# Altium PCB UNReLo End Node PCB.PcbDoc (part 1 of 2)
Units mm, origin at the board's own origin, x right, y up, seen from the top; angles counter-clockwise.
Board outline 54 x 59 mm, 4 copper layers (Top Layer, GND, 3v3 PWR, Bottom Layer), stack 1.586 mm thick; 54 components, 49 nets, 237 pads, 64 vias.
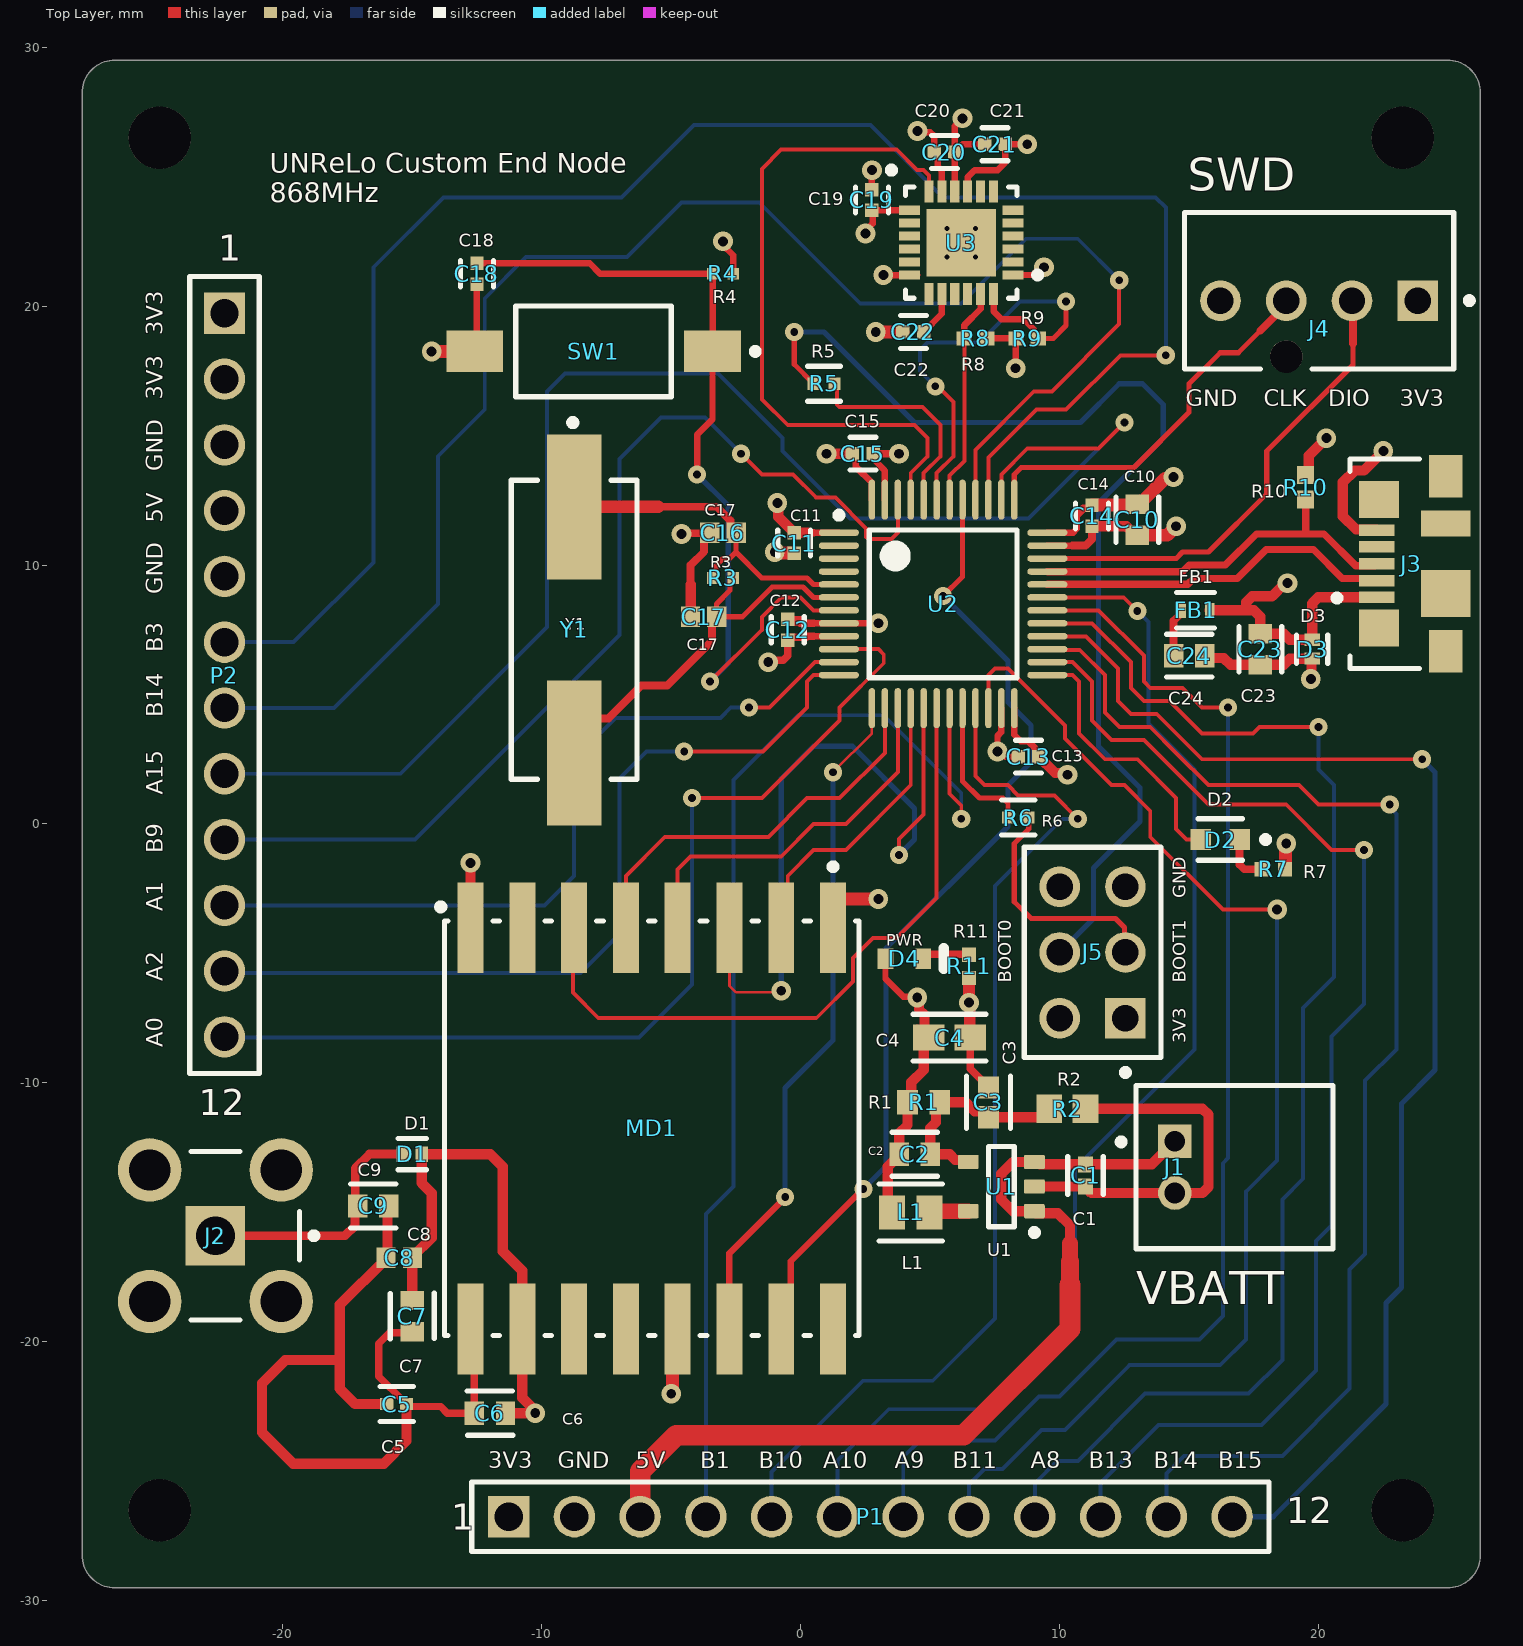
[diagram p0: Top Layer view]
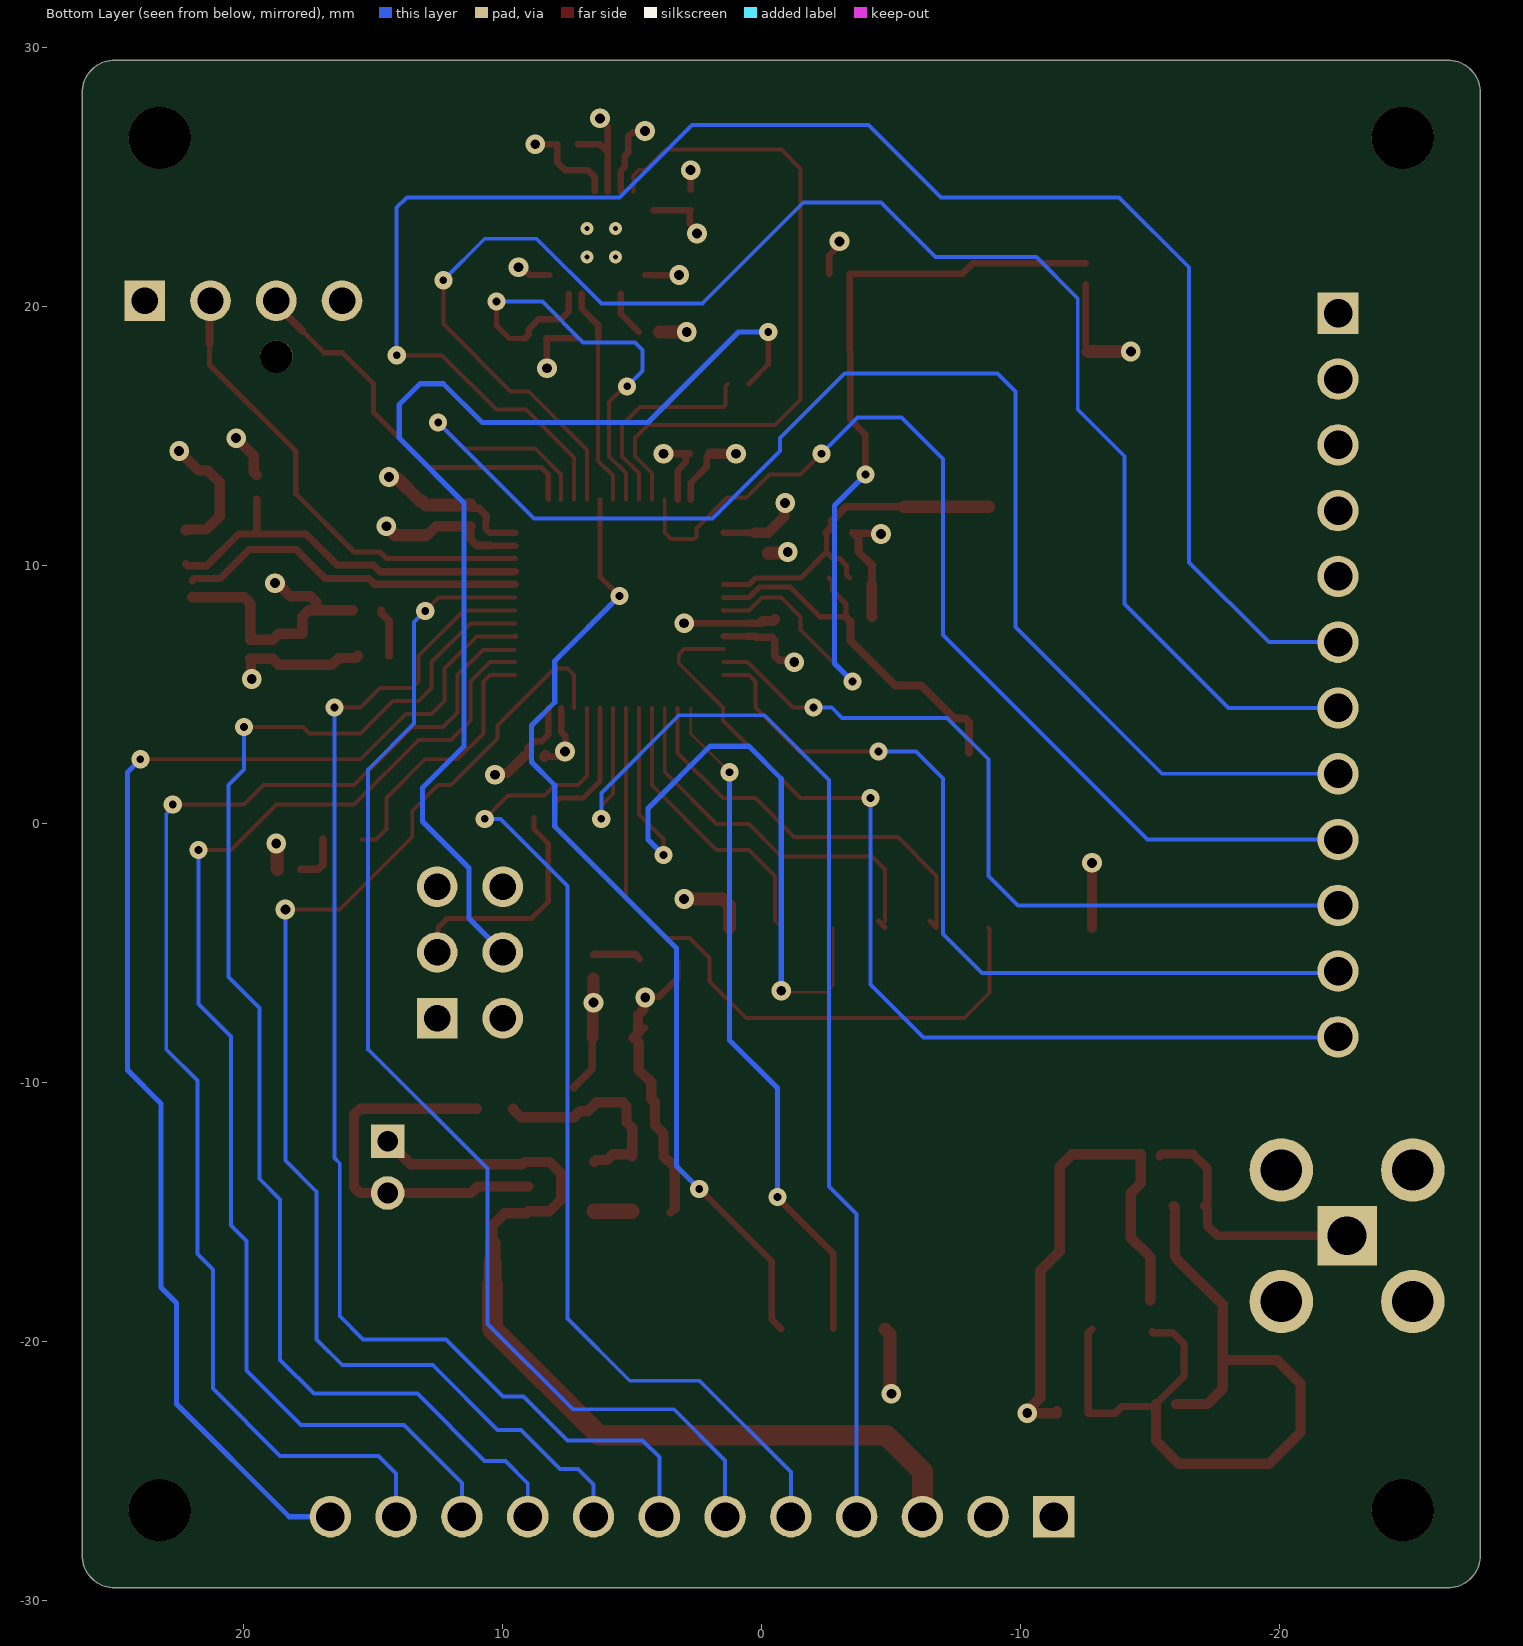
[diagram p1: Bottom Layer view, seen from below]
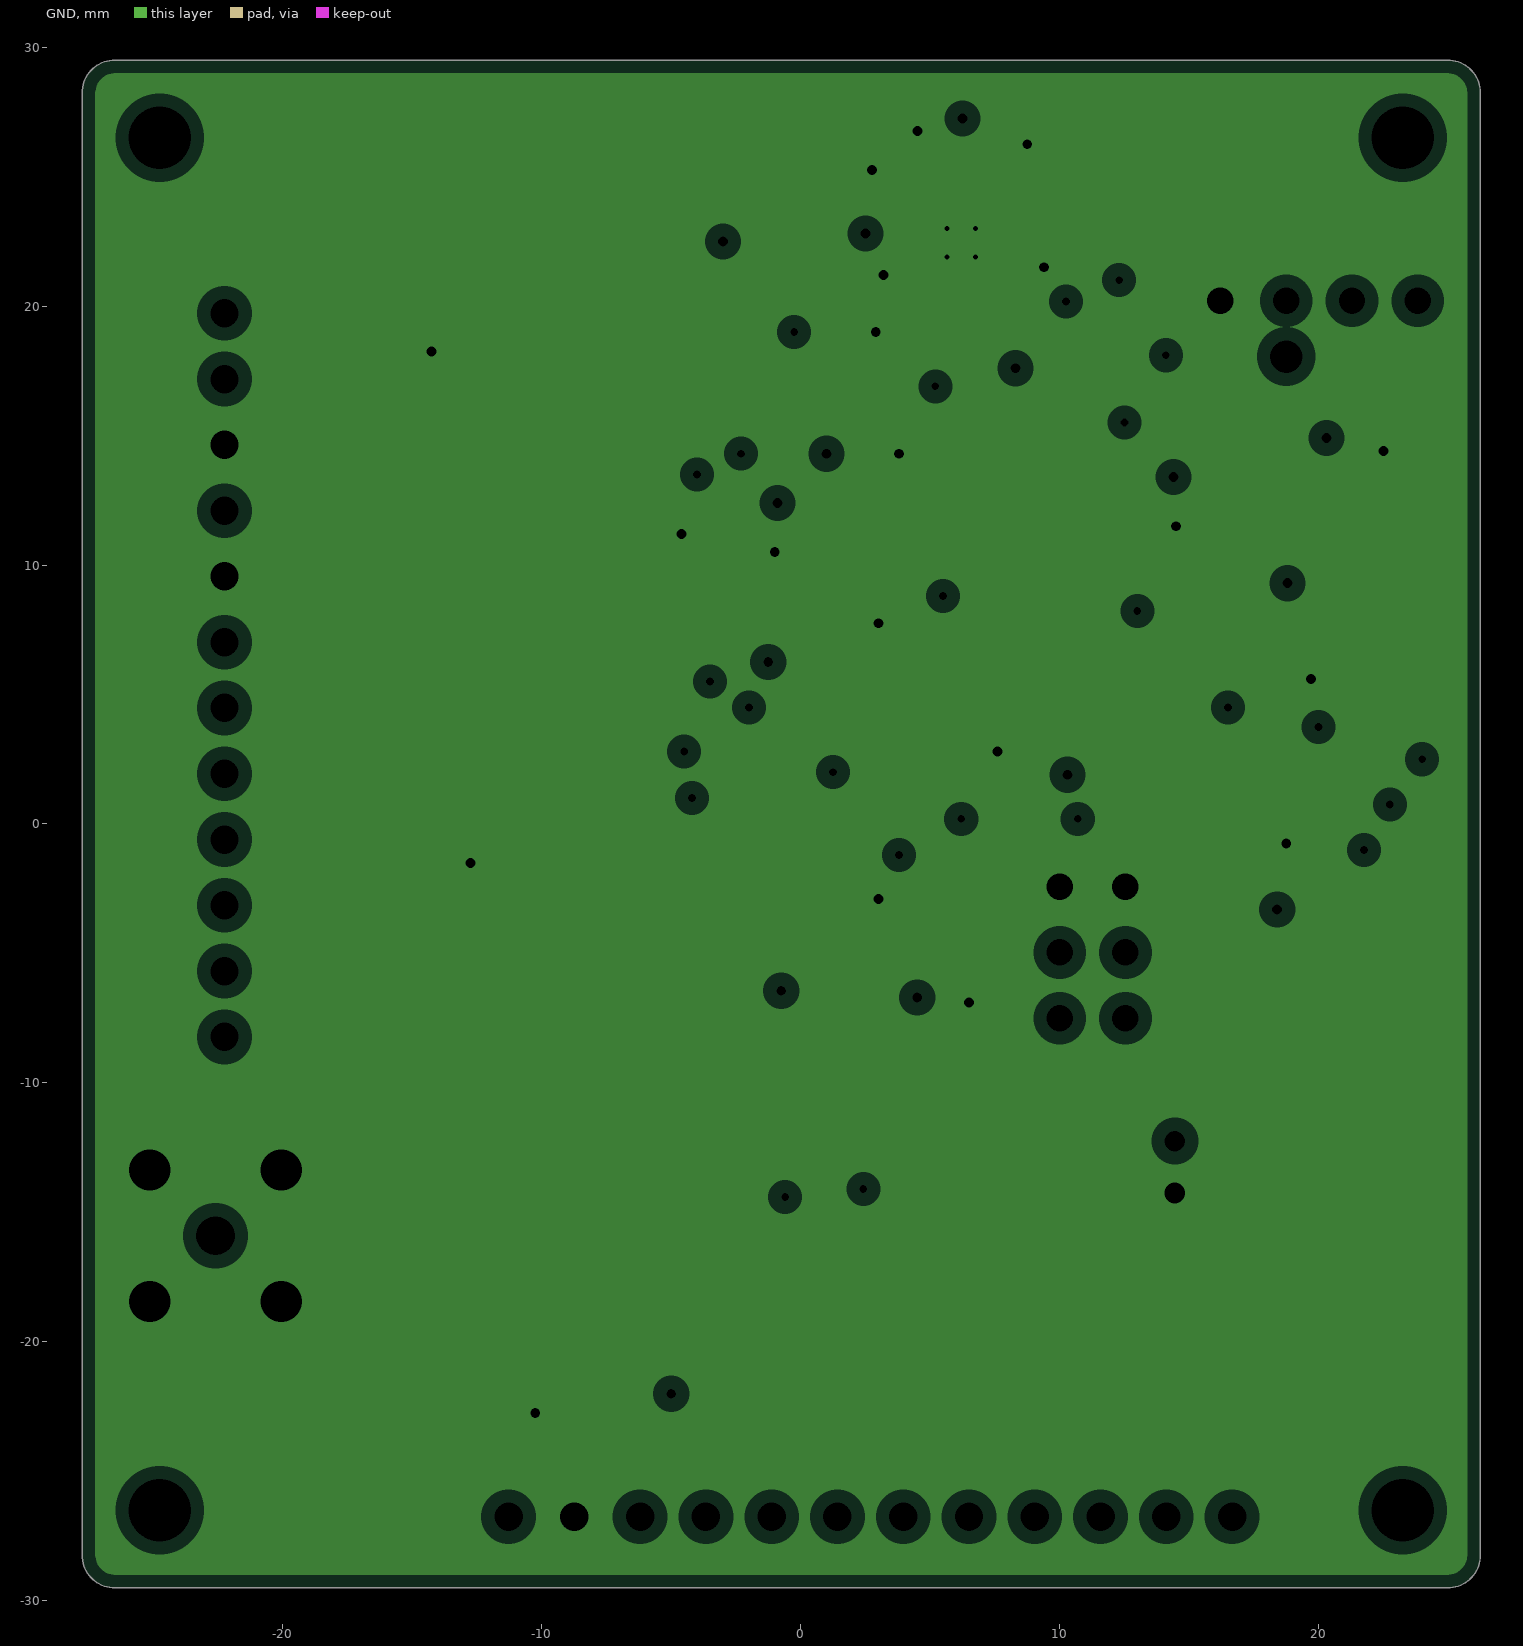
[diagram p2: GND, clearances drawn from the general rule]
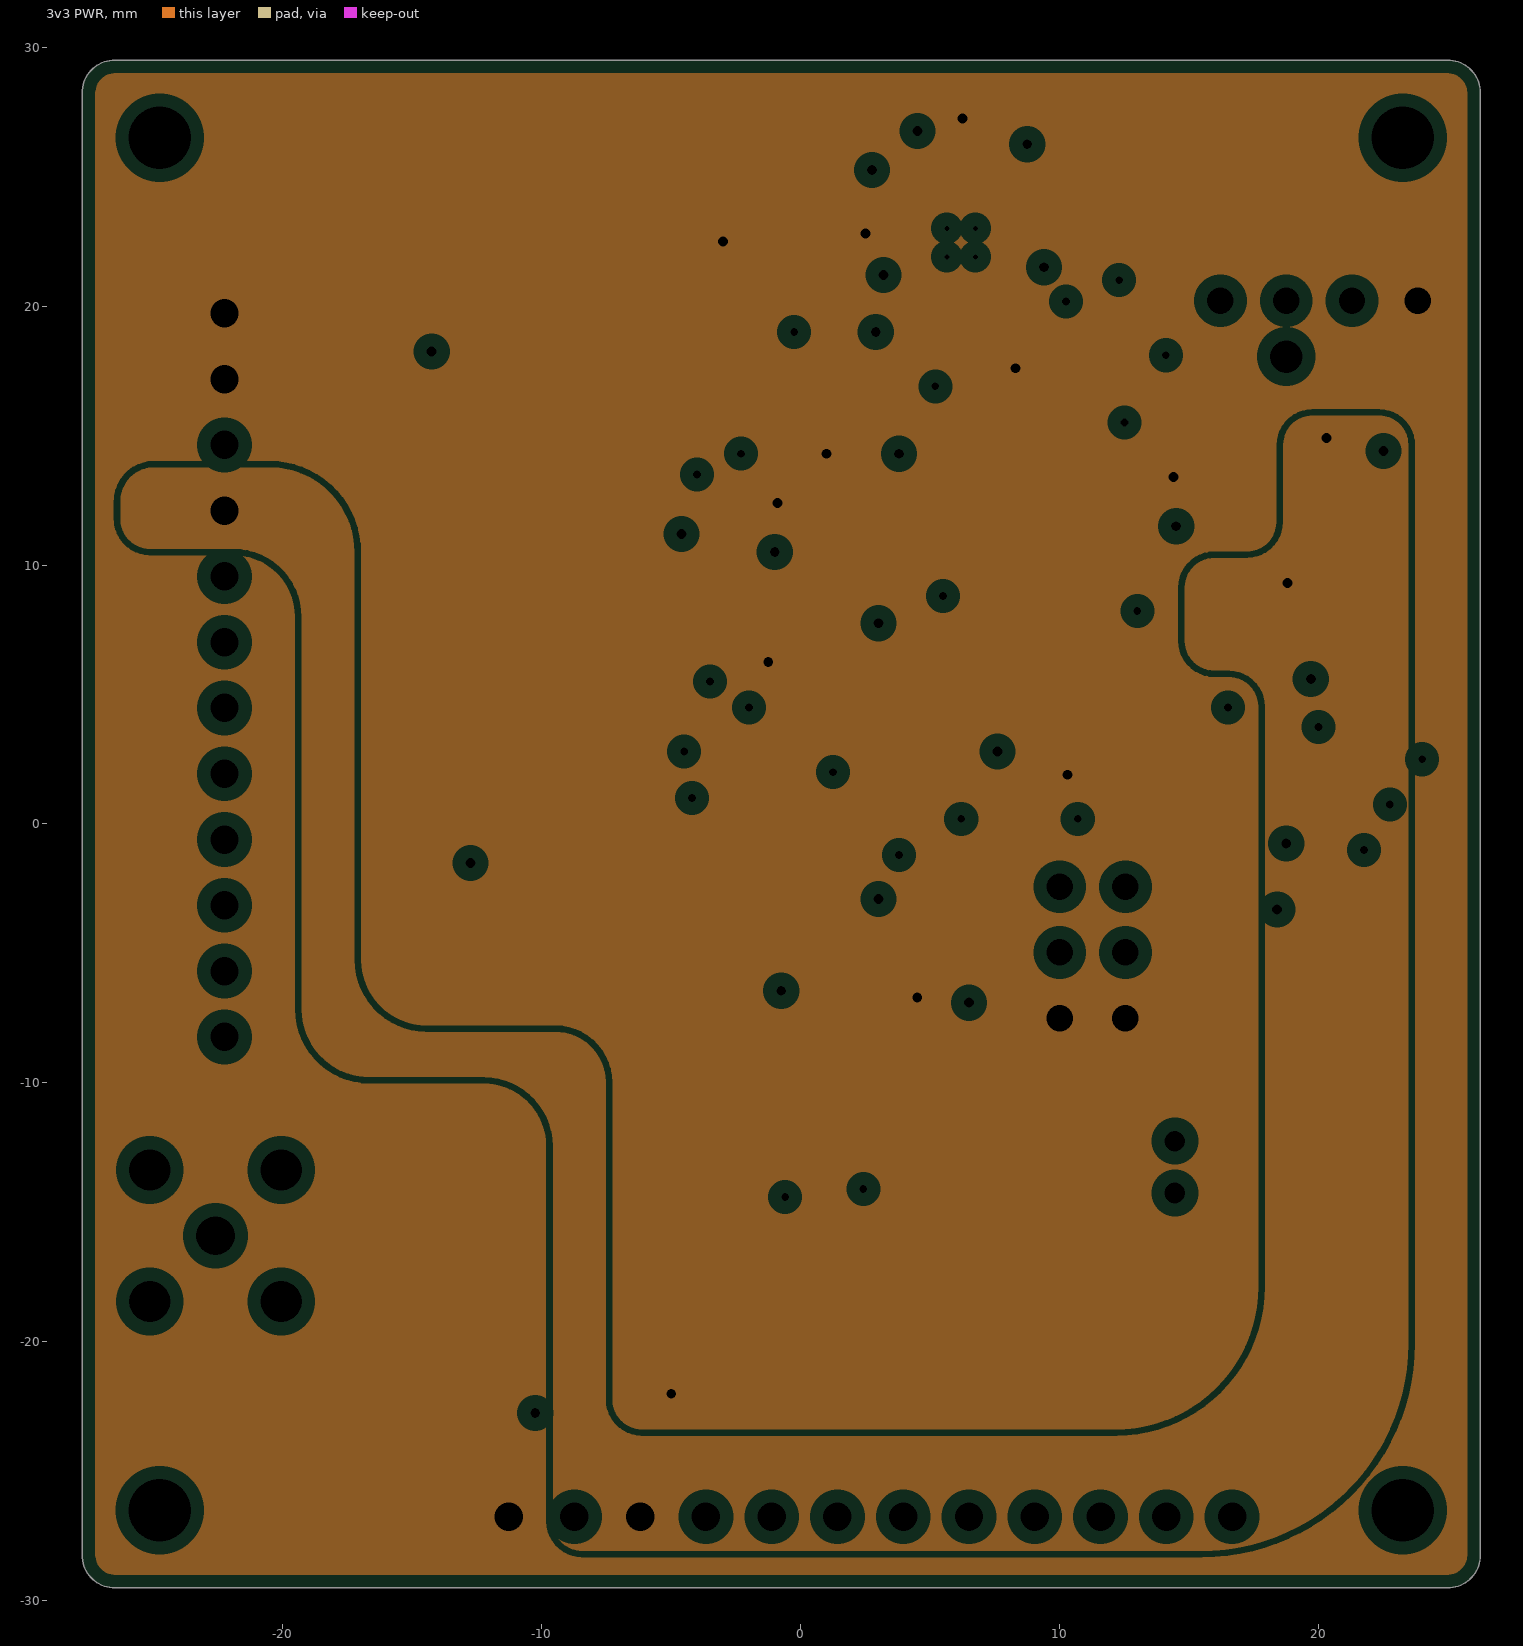
[diagram p3: 3v3 PWR, clearances drawn from the general rule]
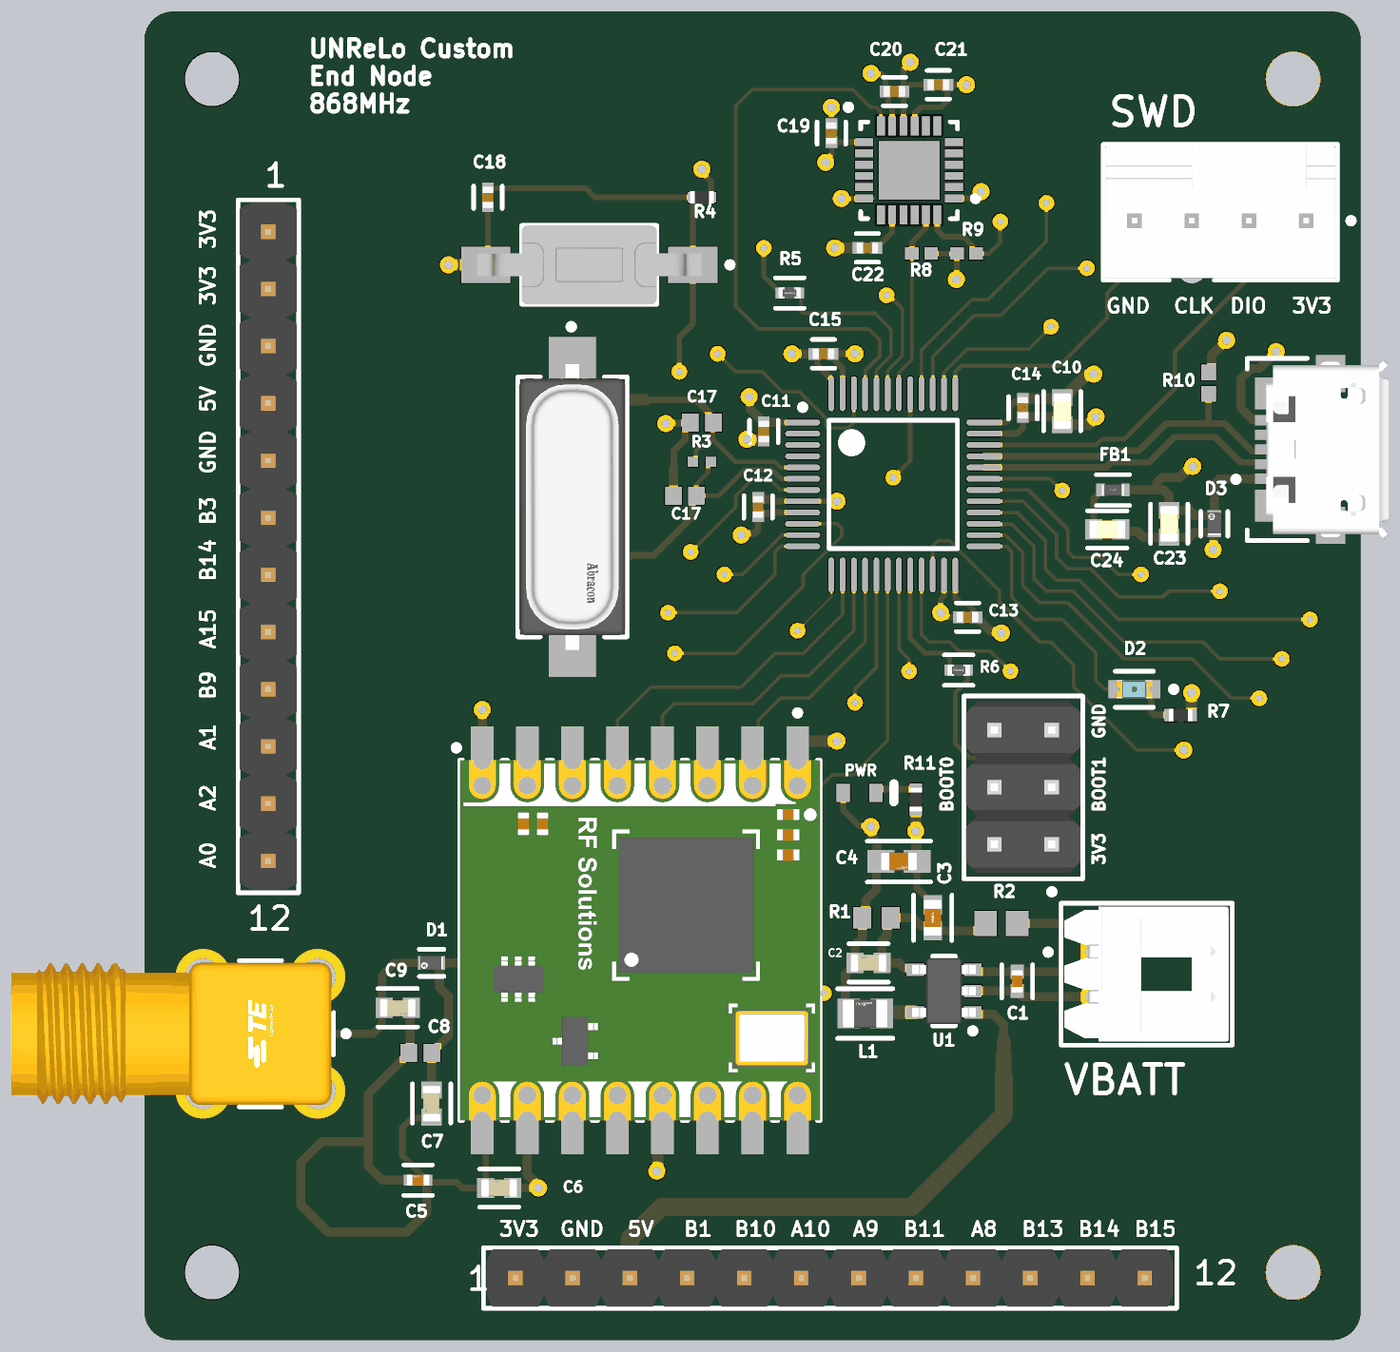
[diagram p5: 3D render of the assembled board from above, using the file's embedded part models]

## Layer stack, top to bottom
Top Solder: solder mask 0.0203, SM-001, Dk 3.8
Top Layer: signal copper 0.035
Dielectric 1: prepreg 0.2104, PP-017, Dk 4.6
GND: plane copper 0.0152, net GND
Dielectric 3: core 1.065, Core-039, Dk 4.6
3v3 PWR: plane copper 0.0152, net (Multiple Nets)
Dielectric 5: prepreg 0.2104, PP-017, Dk 4.6
Bottom Layer: signal copper 0.035
Bottom Solder: solder mask 0.0203, SM-001, Dk 3.8

## Board outline
-26.48,-29.5 cw(c-26.48,-28.23) -27.75,-28.23 -27.75,28.23 cw(c-26.48,28.23) -26.48,29.5 24.98,29.5 cw(c24.98,28.23) 26.25,28.23 26.25,-28.23 cw(c24.98,-28.23) 24.98,-29.5

## Design rules (kind name [scope] priority, off if disabled: settings)
Clearance [All] p1: gap=0.254 ignorepadtopadclearanceinfootprint=FALSE except(0.15: Arc-Arc Arc-Track Arc-Text Track-Track Track-Text SMDPad-SMDPad SMDPad-Text THPad-Text Via-Text Text-Text; 0.2: Arc-SMDPad Track-SMDPad; 0.35: Arc-THPad Track-THPad; 0.5: Arc-Hole Track-Hole SMDPad-Hole THPad-Hole Via-Hole Fill-Hole Poly-Hole Region-Hole Text-Hole)
DiffPairsRouting [All] p1: maxlimit=0.203 minlimit=0.203 mostfreqgap=0.203 toplayer_minwidth=0.284 toplayer_maxwidth=0.284 toplayer_prefwidth=0.284 bottomlayer_minwidth=0.284 bottomlayer_maxwidth=0.284 bottomlayer_prefwidth=0.284 impedanceprofiledriven=TRUE impedanceprofileid={87045DD7-67EE-41DC-9E3B-F64E1280B09F} impedanceprofilevalue=90.000000 maxuncoupledlength=12.7
HoleSize [All] p1: absolutevalues=TRUE maxlimit=6.3 minlimit=0.2 maxpercent=80.000 minpercent=20.000
HoleToHoleClearance [All] p1: gap=0.5 allowstackedmicrovias=TRUE
MinimumAnnularRing [All] p1: minimumring=0.13
MinimumSolderMaskSliver [All] p1: minsoldermaskwidth=0.2
PlaneClearance [All] p1: clearance=0.508
PlaneConnect [All] p1: planeconnectstyle=Relief reliefexpansion=0.508 reliefentries=4 reliefconductorwidth=0.254 reliefairgap=0.254
PolygonConnect [All] p1: connectstyle=Relief reliefconductorwidth=0.254 reliefentries=4 polygonreliefangle="90 Angle" airgapwidth=0.254
RoutingVias [All] p1: holewidth=0.381 width=0.762 viastyle="Through Hole" minholewidth=0.25 minwidth=0.5 maxholewidth=6.3 maxwidth=1.27
SilkToSolderMaskClearance [IsPad] p1: minsilkscreentomaskgap=0.15 clearancetoexposedcopper=TRUE
SolderMaskExpansion [All] p1: expansion=0.05 istentingtop=FALSE soldermaskfromhole=TRUE
UnRoutedNet [All] p1: checkbadconnections=TRUE
Width Width_1 [InNetClass('Non Feeds')] p1: maxlimit=0.5 minlimit=0.127 preferedwidth=0.15
Width controlled-impedance [InNet('RF')] p2: maxlimit=0.345 minlimit=0.345 preferedwidth=0.345 impedanceprofiledriven=TRUE impedanceprofileid={D0823A8F-EB08-422B-9D9E-37F3586B5351} impedanceprofilevalue=50.000000 minimp=50.000000 maximp=50.000000 favimp=50.000000
22 further rules are at their usual default settings.

## Classes and differential pairs
net class DIFF_USB: USB_D_N USB_D_P
differential pair USB_D: +USB_D_P -USB_D_N

## Components (designator, comment, footprint, x,y, rotation, side; value= is the part's Value field where it differs from the comment)
C1 "4.7u" FP-GRM155-0_1-IPC_B 11,-13.571 r270 top
C2 "6p8" FP-C0603C-CF-MFG 4.4,-12.75 r0 top value="6.8 pF"
C3 "33p" FP-CC0603-0_9-IPC_C 7.25,-10.75 r90 top
C4 "10uF" FP-GRM188-0_1-e0_2_0_55-IPC_A 5.75,-8.25 r0 top
C5 "1.5pF" FP-GJM155-0_05-IPC_C -15.6,-22.4 r180 top
C6 "3.3pF" FP-C0603C-CF-MFG -12,-22.75 r0 top value="3.3 pF"
C7 "3.3pF" FP-C0603C-CF-MFG -15,-19 r90 top value="3.3 pF"
C8 "2.7pF" CAPC1006X50X20ML10T10 -15.5,-16.75 r180 top
C9 "56pF, 1%" FP-C0603C-CF-MFG -16.5,-14.75 r180 top value="56 pF"
C10 "2u2" FP-C0603C225K4PACTU-MFG 13,11.75 r270 top
C11 "100n" FP-C0402-BB-MFG -0.25,10.85 r270 top value="0.10 μF"
C12 "100n" FP-C0402-BB-MFG -0.5,7.5 r90 top value="0.10 μF"
C13 "100n" FP-C0402-BB-MFG 8.8,2.6 r180 top value="0.10 μF"
C14 "100n" FP-C0402-BB-MFG 11.25,11.9 r270 top value="0.10 μF"
C15 "100n" FP-C0402-BB-MFG 2.4,14.3 r0 top value="0.10 μF"
C16 "22p" CAPC1006X50X20ML10T10 -3,11.25 r0 top
C17 "22p" CAPC1006X50X20ML10T10 -3.75,8 r0 top
C18 "100n" FP-C0402-BB-MFG -12.5,21.25 r270 top value="0.10 μF"
C19 "100n" FP-C0402-BB-MFG 2.75,24.1 r90 top value="0.10 μF"
C20 "100n" FP-C0402-BB-MFG 5.55,25.95 r180 top value="0.10 μF"
C21 "10n" FP-C0402-BB-MFG 7.5,26.25 r0 top value="0.01 μF"
C22 "2n2" FP-C0402-BB-MFG 4.35,19 r180 top value="2.2 nF"
C23 "2u2" FP-C0603C225K4PACTU-MFG 17.75,6.75 r270 top
C24 "2u2" FP-C0603C225K4PACTU-MFG 15,6.5 r0 top
D1 "ESD" FP-711AM-CA-MFG -15,-12.75 r180 top value=0.24pF
D2 "LED" FP-LTST-C191TBKT-MFG 16.2,-0.6 r180 top
D3 "ESD" FP-711AM-CA-MFG 19.75,6.75 r90 top value=0.24pF
D4 "PWR_LED" VISH-TLMS1000_V 4,-5.2 r0 top
FB1 "120R" FP-MMZ1005-IPC_B 15.25,8.25 r180 top
J1 "BATT IN" FP-53254-0270-MFG 16.75,-13.25 r270 top
J2 "5-1814400-2" FP-5-1814400-2-MFG -26.55,-15.9 r180 top
J3 "MICRO_USB" FP-473460001-MFG 24.56,10.05 r90 top
J4 "SWD" FP-47053-1000-MFG 20.02,20.59 r0 top
J5 "BOOT" FP-M20-9980346-MFG 11.27,-4.96 r90 top
L1 "2u2" FP-LQM21PH_G0-IPC_C 4.25,-15 r180 top
MD1 "RFM95W-868S2" FP-RFM95W-868S2-MFG -5.75,-11.75 r270 top
P1 "HEADER" 61301211121 2.69,-26.75 r0 top
P2 "HEADER" 61301211121 -22.25,5.75 r270 top
R1 "562k" RESC1609X50X30NL10T20 4.75,-10.75 r180 top
R2 "100k" RESC1608X55X30ML20T20 10.3,-11 r180 top
R3 "10M" RESC1005X40X25LL05T05 -3,9.5 r0 top
R4 "10k" RESC1005X40X25LL05T05 -3,21.25 r180 top
R5 "100k" FP-ERJ2RK-IPC_C 0.902,17 r180 top
R6 "100k" FP-ERJ2RK-IPC_C 8.402,0.25 r0 top
R7 "1k" RESC1005X40X25NL05T05 18.25,-1.75 r180 top
R8 "2k2" RESC1005X40X25NL05T10 6.75,18.75 r0 top
R9 "2k2" RESC1005X40X25NL05T10 8.75,18.75 r180 top
R10 "1.5k" RESC1005X40X25ML05T10 19.5,13 r90 top
R11 "1k" RESC1005X40X25NL05T05 6.5,-5.5 r90 top
SW1 "SW-PB" TECO-FSMSM-2_V -8,18.25 r180 top
U1 "VREG" DBV0005A_L 7.75,-14 r180 top
U2 "STM32F103CBT6" STM-LQFP48_L 5.5,8.5 r0 top
U3 "MPU-6050" IS-QFN-24_V 6.2,22.45 r180 top
Y1 "8MHz" FP-ABLS-MFG -8.75,7.5 r270 top

## Footprints (in the part's own frame and the unit in brackets; to place one, negate y for a bottom-side part, rotate by r counter-clockwise, add the part's x,y. Pads: shape width x height; smd on the part's side, far side on the other; paste and mask are expansions set on the pad)
61301211121 [mm] "Pin Header, pitch 2.54 mm, THT, Vertical, single row, 12p"
  rect 1.6x1.6 hole 1.1: 1(-13.97,0)
  round 1.6 hole 1.1: 2(-11.43,0) 3(-8.89,0) 4(-6.35,0) 5(-3.81,0) 6(-1.27,0) 7(1.27,0) 8(3.81,0) 9(6.35,0) 10(8.89,0) 11(11.43,0) 12(13.97,0)
  silkscreen extent -15.39,-1.35 15.39,1.35, body extent -15.24,-1.27 15.24,1.27, height 8.57
CAPC1006X50X20ML10T10 [mm] "Chip Capacitor, 2-Leads, Body 1.00x0.55mm, IPC Low Density"
  rect 0.74x0.8 smd: 1(-0.51,0) 2(0.51,0)
  body extent -0.55,-0.33 0.55,0.32, height 0.5
DBV0005A_L [mm] "SOT23, 5-Leads, Body 3.05x1.75mm, Pitch 0.95mm, IPC High Density"
  rrect18% 0.8x0.55 smd: 1(-1.275,0.95) 2(-1.275,0) 3(-1.275,-0.95) 4(1.275,-0.95) 5(1.275,0.95)
  silkscreen extent -1.4,-1.55 0.5,1.9, body extent -1.42,-1.46 1.42,1.46, height 1.08
FP-5-1814400-2-MFG [mm]
  rect 2.3x2.3 hole 1.5 paste-1000 mask+0: 1(-3.95,0)
  round 2.45 hole 1.6 paste-1000 mask+0: 2(-6.49,2.54) 3(-1.41,2.54) 4(-6.49,-2.54) 5(-1.41,-2.54)
  silkscreen extent -7.88,-3.25 -3.01,3.25, body extent -7.81,-3.87 7.3,3.87, height 0.25
FP-711AM-CA-MFG [mm]
  rect 0.47x0.6 smd paste+0 mask+0: 1(-0.365,0) 2(0.365,0)
  silkscreen extent -0.55,-0.6 0.55,0.6, body extent -0.7,-0.43 0.7,0.43, height 0.25
FP-47053-1000-MFG [mm]
  rect 1.57x1.57 hole 1.02 paste-1000 mask+0: 1(3.81,-0.38)
  round 1.57 hole 1.02 paste-1000 mask+0: 2(1.27,-0.38) 3(-1.27,-0.38) 4(-3.81,-0.38)
  round 1.25 hole 1.25 unplated paste-1000 mask+0: ""(-1.27,-2.54)
  silkscreen extent -5.2,-3.02 5.93,3.02, body extent -5.3,-3.26 5.3,3.12, height 0.25
FP-53254-0270-MFG [mm]
  rect 1.3x1.3 hole 0.8 paste-1000 mask+0: 1(-1,-2.3)
  round 1.3 hole 0.8 paste-1000 mask+0: 2(1,-2.3)
  silkscreen extent -3.15,-4.5 3.15,3.8, body extent -3.25,-3.9 3.25,3.9, height 0.25
FP-473460001-MFG [mm]
  rect 0.45x1.38 smd paste+0 mask+0: 1(-1.3,2.31) 2(-0.65,2.31) 3(0,2.31) 4(0.65,2.31) 5(1.3,2.31)
  rect 1.425x1.55 smd paste+0 mask+0: 6(-2.488,2.225) 7(2.488,2.225)
  rect 1.65x1.3 smd paste+0 mask+0: 8(-3.375,-0.35) 11(3.375,-0.35)
  rect 1.8x1.9 smd paste+0 mask+0: 9(-1.15,-0.35)
  rect 1x1.9 smd paste+0 mask+0: 10(1.55,-0.35)
  silkscreen extent -4.05,0.67 4.05,3.97, body extent -4.3,-2.48 4.3,3.45, height 0.25
FP-ABLS-MFG [mm]
  rect 5.6x2.1 smd paste+0 mask+0: 1(-4.75,0) 2(4.75,0)
  silkscreen extent -5.77,-2.42 5.77,2.42, body extent -7.65,-2.52 7.65,2.52, height 0.25
FP-C0402-BB-MFG [mm]
  rect 0.52x0.52 smd paste+0 mask+0: 1(-0.4,0) 2(0.4,0)
  silkscreen extent -0.5,-0.64 0.5,0.64, body extent -0.8,-0.4 0.8,0.4, height 0.25
FP-C0603C225K4PACTU-MFG [mm]
  rect 0.75x0.9 smd paste+0 mask+0: 1(-0.6,0) 2(0.6,0)
  silkscreen extent -0.87,-0.82 0.87,0.82, body extent -1.2,-0.6 1.2,0.6, height 0.25
FP-C0603C-CF-MFG [mm]
  rect 0.75x0.9 smd paste+0 mask+0: 1(-0.6,0) 2(0.6,0)
  silkscreen extent -0.87,-0.85 0.88,0.85, body extent -1.2,-0.6 1.2,0.6, height 0.25
FP-CC0603-0_9-IPC_C [mm]
  rect 0.858x0.812 smd paste+0 mask+0: 1(-0.577,0) 2(0.577,0)
  silkscreen extent -1.01,-0.85 1.01,0.85, body extent -1.11,-0.55 1.11,0.55, height 0.25
FP-ERJ2RK-IPC_C [mm]
  rect 0.468x0.472 smd paste+0 mask+0: 1(-0.402,0) 2(0.402,0)
  silkscreen extent -0.64,-0.67 0.64,0.67, body extent -0.74,-0.38 0.74,0.38, height 0.25
FP-GJM155-0_05-IPC_C [mm]
  rect 0.515x0.472 smd paste+0 mask+0: 1(-0.379,0) 2(0.379,0)
  silkscreen extent -0.64,-0.67 0.64,0.67, body extent -0.74,-0.38 0.74,0.38, height 0.25
FP-GRM155-0_1-IPC_B [mm]
  rect 0.615x0.572 smd paste+0 mask+0: 1(-0.429,0) 2(0.429,0)
  silkscreen extent -0.74,-0.69 0.74,0.69, body extent -0.89,-0.44 0.89,0.44, height 0.25
FP-GRM188-0_1-e0_2_0_55-IPC_A [mm]
  rect 1.208x1.012 smd paste+0 mask+0: 1(-0.802,0) 2(0.802,0)
  silkscreen extent -1.41,-0.91 1.41,0.91, body extent -1.91,-1.01 1.91,1.01, height 0.25
FP-LQM21PH_G0-IPC_C [mm]
  rect 1.006x1.308 smd paste+0 mask+0: 1(-0.726,0) 2(0.726,0)
  silkscreen extent -1.23,-1.1 1.23,1.1, body extent -1.33,-0.8 1.33,0.8, height 0.25
FP-LTST-C191TBKT-MFG [mm]
  rect 0.8x0.8 smd paste+0 mask+0: 1(-0.75,0) 2(0.75,0)
  silkscreen extent -1.88,-0.8 0.85,0.8, body extent -1.25,-0.55 1.25,0.55, height 0.25
FP-M20-9980346-MFG [mm]
  rect 1.57x1.57 hole 1.02 paste-1000 mask+0: 1(-2.54,-1.27)
  round 1.57 hole 1.02 paste-1000 mask+0: 2(-2.54,1.27) 3(0,-1.27) 4(0,1.27) 5(2.54,-1.27) 6(2.54,1.27)
  silkscreen extent -4.76,-2.64 4.06,2.64, body extent -4.16,-2.74 4.16,2.74, height 0.25
FP-MMZ1005-IPC_B [mm]
  rect 0.372x0.572 smd paste+0 mask+0: 1(-0.55,0) 2(0.55,0)
  silkscreen extent -0.74,-0.69 0.74,0.69, body extent -0.89,-0.44 0.89,0.44, height 0.25
FP-RFM95W-868S2-MFG [mm]
  rect 3.5x1 smd paste+0 mask+0: 1(-7.75,7) 2(-7.75,5) 3(-7.75,3) 4(-7.75,1) 5(-7.75,-1) 6(-7.75,-3) 7(-7.75,-5) 8(-7.75,-7) 9(7.75,-7) 10(7.75,-5) 11(7.75,-3) 12(7.75,-1) 13(7.75,1) 14(7.75,3) 15(7.75,5) 16(7.75,7)
  silkscreen extent -10.22,-8 8,8, body extent -9.6,-8.1 9.6,8.1, height 0.25
IS-QFN-24_V [mm] "QFN, 24-Leads, Body 4x4mm, Pitch 0.5mm, Thermal Pad 2.7x2.6mm"
  rect 0.8x0.35 smd: 1(-2,1.25) 2(-2,0.75) 3(-2,0.25) 4(-2,-0.25) 5(-2,-0.75) 6(-2,-1.25) 13(2,-1.25) 14(2,-0.75) 15(2,-0.25) 16(2,0.25) 17(2,0.75) 18(2,1.25)
  rect 0.35x0.85 smd mask+0.102: 7(-1.25,-1.975) 8(-0.75,-1.975) 9(-0.25,-1.975) 10(0.25,-1.975) 11(0.75,-1.975) 12(1.25,-1.975) 19(1.25,1.975) 20(0.75,1.975) 21(0.25,1.975) 22(-0.25,1.975) 23(-0.75,1.975) 24(-1.25,1.975)
  rect 2.7x2.6 smd: 25(0,0)
  silkscreen extent -3.08,-2.15 2.15,2.15, body extent -2,-2 2,2, height 0.95
RESC1005X40X25LL05T05 [mm] "Chip Resistor, 2-Leads, Body 1.00x0.50mm, IPC High Density"
  rect 0.45x0.45 smd: 1(-0.4,0) 2(0.4,0)
  body extent -0.53,-0.27 0.53,0.28, height 0.4
RESC1005X40X25ML05T10 [mm] "Chip Resistor, 2-Leads, Body 1.00x0.50mm, IPC Low Density"
  rect 0.7x0.65 smd: 1(-0.475,0) 2(0.475,0)
  body extent -0.53,-0.27 0.53,0.28, height 0.4
RESC1005X40X25NL05T05 [mm] "Chip Resistor, 2-Leads, Body 1.05x0.55mm, IPC Medium Density"
  rect 0.55x0.55 smd: 1(-0.45,0) 2(0.45,0)
  body extent -0.53,-0.28 0.53,0.28, height 0.4
RESC1005X40X25NL05T10 [mm] "Chip Resistor, 2-Leads, Body 1.00x0.50mm, IPC Medium Density"
  rect 0.6x0.55 smd: 1(-0.425,0) 2(0.425,0)
  body extent -0.53,-0.27 0.53,0.28, height 0.4
RESC1608X55X30ML20T20 [mm] "Chip Resistor, 2-Leads, Body 1.60x0.80mm, IPC Low Density"
  rect 1x1.1 smd: 1(-0.7,0) 2(0.7,0)
  body extent -0.9,-0.5 0.9,0.5, height 0.55
RESC1609X50X30NL10T20 [mm] "Chip Resistor, 2-Leads, Body 1.55x0.85mm, IPC Medium Density"
  rect 0.8x0.95 smd: 1(-0.625,0) 2(0.625,0)
  body extent -0.82,-0.48 0.82,0.48, height 0.5
STM-LQFP48_L [mm] "QFP, 48-Leads, Body 7x7mm, Pitch 0.5mm, IPC High Density"
  oval 1.55x0.25 smd: 1(-4.025,2.75) 2(-4.025,2.25) 3(-4.025,1.75) 4(-4.025,1.25) 5(-4.025,0.75) 6(-4.025,0.25) 7(-4.025,-0.25) 8(-4.025,-0.75) 9(-4.025,-1.25) 10(-4.025,-1.75) 11(-4.025,-2.25) 12(-4.025,-2.75) 25(4.025,-2.75) 26(4.025,-2.25) 27(4.025,-1.75) 28(4.025,-1.25) 29(4.025,-0.75) 30(4.025,-0.25) 31(4.025,0.25) 32(4.025,0.75) 33(4.025,1.25) 34(4.025,1.75) 35(4.025,2.25) 36(4.025,2.75)
  oval 0.25x1.55 smd: 13(-2.75,-4.025) 14(-2.25,-4.025) 15(-1.75,-4.025) 16(-1.25,-4.025) 17(-0.75,-4.025) 18(-0.25,-4.025) 19(0.25,-4.025) 20(0.75,-4.025) 21(1.25,-4.025) 22(1.75,-4.025) 23(2.25,-4.025) 24(2.75,-4.025) 37(2.75,4.025) 38(2.25,4.025) 39(1.75,4.025) 40(1.25,4.025) 41(0.75,4.025) 42(0.25,4.025) 43(-0.25,4.025) 44(-0.75,4.025) 45(-1.25,4.025) 46(-1.75,4.025) 47(-2.25,4.025) 48(-2.75,4.025)
  silkscreen extent -4.15,-2.85 2.85,3.55, body extent -3.5,-3.5 3.5,3.5, height 1.6
TECO-FSMSM-2_V [mm] "SMD, 2-Leads, Body 6x3.5mm, Pitch 9.19mm"
  rect 2.2x1.6 smd: 1(-4.595,0)
  rect 2.18x1.6 smd: 2(4.595,0)
  silkscreen extent -6.37,-1.75 3,1.75, body extent -4.98,-1.75 4.98,1.75, height 4.4
VISH-TLMS1000_V [mm] "SMD, 2-Leads, Body 0.8x1.6mm"
  rect 0.6x0.8 smd: 1(-0.725,0) 2(0.725,0)
  silkscreen extent 1.52,-0.4 1.52,0.4, body extent -0.8,-0.4 0.8,0.4, height 0.65

## Part data
C1: library part CMP-2008-04549-2, "Chip Multilayer Ceramic Capacitors for General Purpose, 0402, 4.7uF, X5R, 15%, 20%, 6.3V", Capacitance=4.7uF, Case Code (Imperial)=0402, Case Code (Metric)=1005, Dielectric=X5R, Manufacturer 1="Samsung Electro-Mechanics", Manufacturer Part Number 1=CL05A475MO5NUNC, Max Operating Temperature=85°C, Min Operating Temperature=-55°C, Package Quantity=10000, Supplier Part Number 1=1276-6836-1-ND, Tolerance=20%, Voltage=6.3V, Voltage Rating=16V, Case/Package=0402, Contact Plating=Tin, Depth=0.5mm, Height=0.5mm, Lead Free="Lead Free", Length=1mm, Mount="Surface Mount", Name=CL05A475MO5NUNC, Packaging="Tape and Reel", REACH SVHC="No SVHC", Supplier 1=Digi-Key, Supplier Unit Price 1=$0.44, Termination=SMD/SMT, Thickness=0.022inch, Voltage Rating (DC)=16V, Weight=0.000212oz, Width=0.02inch
C2: library part CMP-2006-03271-2, "CAP CER 6.8PF 50V NP0 0603", Capacitance="6.8 pF", Manufacturer=KEMET, Manufacturer 1="TDK Corporation", Manufacturer Part Number=C0603C689C5GACTU, Manufacturer Part Number 1=C1608CH2A6R8D080AA, Package=C0603C-CF, Supplier Part Number 1=445-11157-1-ND, Temperature="-55°C to +125°C", Temperature Characteristic=C0G, Temperature Coefficient=30ppm/°C, Temperature Range High=+125°C, Temperature Range Low=-55°C, Tolerance="0.25 pF", Voltage Rating="100 V", Automotive=Yes, Automotive Grade="Grade 1", Category=Cap, ComponentLink2Description=Datasheet, ComponentLink2URL=https://api.kemet.com/component-edge/download/datasheet/C0603C100J5GACAUTO.pdf, Device Class L1="Passive Components", Device Class L2=Capacitors, Device Class L3="Ceramic Capacitors", Digikey Description="CAP CER 6.8PF 50V NP0 0603", Height=0.87mm, Lead Free=Yes, Material=Ceramic, Mouser Description="0603 C 6.8pF Ceramic Multilayer Capacitor; 50V dc; +125C; C0G Dielectric; +/-0.25pF", Name=C1608CH2A6R8D080AA, Octopart=https://octopart.com/c0603c689c5gactu-kemet-8718591, RoHS=TRUE, Supplier 1=Digi-Key, Supplier Unit Price 1=$0.14
C3: library part CMP-2000-06072-2, "CAP CER 33PF 50V C0G/NPO 0603", Capacitance=33pF, Case Code (Imperial)=0603, Case Code (Metric)=1608, Dielectric=C0G, Dielectric Material=Ceramic, Insulation Resistance=100GR, Manufacturer 1=KEMET, Manufacturer Part Number 1=C0603H330J5GAC7867, Max Operating Temperature=125°C, Min Operating Temperature=-55°C, Package Quantity=1, Supplier Part Number 1=399-17603-1-ND, Temperature Coefficient=30ppm/°C, Tolerance=5%, Voltage=50V, Case/Package=0603, Depth=0.8mm, Height=0.8mm, Lead Free="Lead Free", Length=1.6mm, Mount="Surface Mount", Name=C0603H330J5GAC7867, Number of Pins=2, Packaging="Tape and Reel", Radiation Hardening=No, REACH SVHC="No SVHC", Resistor Type=Ceramic, RoHS Compliant=Yes, Series=CC, Supplier 1=Digi-Key, Supplier Unit Price 1=0.76, Termination=SMD/SMT, Thickness=0.035inch, Voltage Rating=50V, Voltage Rating (DC)=50V, Width=0.031inch
C4: library part CMP-2006-02792-2, "10 µF ±10% 10V Ceramic Capacitor X5R 0603 (1608 Metric)", Case Code (Imperial)=0603, Case Code (Metric)=1608, Dielectric=X5R, Manufacturer 1="Murata Electronics", Manufacturer Part Number 1=GRT188R61A106KE13D, Max Operating Temperature=85°C, Min Operating Temperature=-55°C, Package Quantity=4000, Supplier Part Number 1=490-12311-1-ND, Tolerance=20%, Voltage=6.3V, Voltage Rating=10V, Capacitance=10uF, Case/Package=0603, Depth=0.8mm, Height=0.8mm, Lead Free="Lead Free", Length=1.6mm, Material=Ceramic, Mount="Surface Mount", Name=GRT188R61A106KE13D, Packaging="Tape and Reel", Radiation Hardening=No, REACH SVHC="No SVHC", Supplier 1=Digi-Key, Supplier Unit Price 1=$0.36, Termination=SMD/SMT, Thickness=0.035inch, Voltage Rating (DC)=10V, Width=0.031inch
C5: library part CMP-2008-03820-2, "Multi-Layer Ceramic Capacitor 1.5pF C0G  ±0.1pF 0402 Paper T/R", Case Code (Imperial)=0402, Case Code (Metric)=1005, Dielectric=C0G, Manufacturer 1=KEMET, Manufacturer Part Number 1=CBR04C159B5GAC, Max Operating Temperature=125°C, Min Operating Temperature=-55°C, Package Quantity=10000, Supplier Part Number 1=399-CBR04C159B5GACCT-ND, Temperature Coefficient=30ppm/°C, Voltage=50V, Capacitance=1.5pF, Case/Package=0402, Construction=Flat, Depth=0.5mm, Height=0.5mm, Lead Free="Lead Free", Lead Pitch=0.3mm, Length=1mm, Mount="Surface Mount", Name=CBR04C159B5GAC, Number of Pins=2, Packaging="Tape and Reel", Radiation Hardening=No, REACH SVHC="No SVHC", Series=GJM, Supplier 1=Digi-Key, Supplier Unit Price 1=$0.17, Termination=SMD/SMT, Thickness=0.022inch, Voltage Rating=50V, Voltage Rating (DC)=50V, Width=0.5mm
C6: library part CMP-1035-00238-3, "CAP CER 3.3PF 50V NP0 0603", Capacitance="3.3 pF", Manufacturer 1=KEMET, Manufacturer Part Number 1=C0603C339C5GACTU, Package=C0603C-CF, Supplier Part Number 1=399-C0603C339C5GAC7867CT-ND, Temperature="-55°C to +125°C", Temperature Characteristic=C0G, Temperature Coefficient=30ppm/°C, Temperature Range High=+125°C, Temperature Range Low=-55°C, Tolerance="0.25 pF", Voltage Rating="50 V", Automotive=Yes, Automotive Grade="Grade 1", Category=Cap, ComponentLink2Description=Datasheet, ComponentLink2URL=https://api.kemet.com/component-edge/download/datasheet/C0603C100J5GACAUTO.pdf, Device Class L1="Passive Components", Device Class L2=Capacitors, Device Class L3="Ceramic Capacitors", Digikey Description="CAP CER 3.3PF 50V NP0 0603", Height=0.87mm, Lead Free=Yes, Material=Ceramic, Mouser Description="Multilayer Ceramic Capacitors MLCC - SMD/SMT 50volts 3.3pF C0G 0.25%", Name=C0603C339C5GACTU, Octopart=https://octopart.com/c0603c339c5gactu-kemet-3701205, RoHS=TRUE, Supplier 1=Digi-Key, Supplier Unit Price 1=$0.34
C7: library part CMP-1035-00238-3, "CAP CER 3.3PF 50V NP0 0603", Capacitance="3.3 pF", Manufacturer 1=KEMET, Manufacturer Part Number 1=C0603C339C5GAC7867, Package=C0603C-CF, Supplier Part Number 1=399-C0603C339C5GAC7867CT-ND, Temperature="-55°C to +125°C", Temperature Characteristic=C0G, Temperature Coefficient=30ppm/°C, Temperature Range High=+125°C, Temperature Range Low=-55°C, Tolerance="0.25 pF", Voltage Rating="50 V", Automotive=Yes, Automotive Grade="Grade 1", Category=Cap, ComponentLink2Description=Datasheet, ComponentLink2URL=https://api.kemet.com/component-edge/download/datasheet/C0603C100J5GACAUTO.pdf, Device Class L1="Passive Components", Device Class L2=Capacitors, Device Class L3="Ceramic Capacitors", Digikey Description="CAP CER 3.3PF 50V NP0 0603", Height=0.87mm, Lead Free=Yes, Material=Ceramic, Mouser Description="Multilayer Ceramic Capacitors MLCC - SMD/SMT 50volts 3.3pF C0G 0.25%", Name=C0603C339C5GAC7867, Octopart=https://octopart.com/c0603c339c5gactu-kemet-3701205, RoHS=TRUE, Supplier 1=Digi-Key, Supplier Unit Price 1=$0.34
C8: library part CMP-2008-04788-1, Manufacturer="AVX Interconnect / Elco", Manufacturer 1=KEMET, Manufacturer Part Number 1=CBR04C279B5GAC, Supplier Part Number 1=399-14751-1-ND, Name=CBR04C279B5GAC, Supplier 1=Digi-Key, Supplier Unit Price 1=$0.15
C9: library part CMP-2006-03385-2, "CAP CER 56PF 50V 1% NP0 0603", Capacitance="56 pF", Manufacturer 1=KEMET, Manufacturer Part Number 1=C0603C560F5GAC7867, Package=C0603C-CF, Supplier Part Number 1=399-C0603C560F5GAC7867CT-ND, Temperature="-55°C to +125°C", Temperature Characteristic=C0G, Temperature Coefficient=30ppm/°C, Temperature Range High=+125°C, Temperature Range Low=-55°C, Tolerance=0.01, Voltage Rating="50 V", Automotive=Yes, Automotive Grade="Grade 1", Category=Cap, ComponentLink2Description=Datasheet, ComponentLink2URL=https://api.kemet.com/component-edge/download/datasheet/C0603C100J5GACAUTO.pdf, Device Class L1="Passive Components", Device Class L2=Capacitors, Device Class L3="Ceramic Capacitors", Digikey Description="CAP CER 56PF 50V 1% NP0 0603", Height=0.87mm, Lead Free=Yes, Material=Ceramic, Mouser Description="Multilayer Ceramic Capacitors MLCC - SMD/SMT 50volts 56pF C0G 1%", Name=C0603C560F5GAC7867, Octopart=https://octopart.com/c0603c560f5gactu-kemet-9143760, RoHS=TRUE, Supplier 1=Digi-Key, Supplier Unit Price 1=$0.22
C10 C23 C24: library part CMP-2006-02259-2, "CAP CER 2.2UF 16V X5R 0603", Capacitance=2.2uF, Case Code (Imperial)=0603, Case Code (Metric)=1608, Dielectric=X5R, Dielectric Material=Ceramic, Manufacturer 1="Taiyo Yuden", Manufacturer Part Number 1=EMK107BB7225MA-T, Max Operating Temperature=85°C, Min Operating Temperature=-55°C, Package Quantity=1, Supplier Part Number 1=587-4864-1-ND, Tolerance=10%, Voltage=16V, Case/Package=0603, Construction=Flat, Contact Plating=Tin, Depth=0.8mm, Dissipation Factor=5%, Height=0.8mm, Lead Free="Lead Free", Length=1.6mm, Mount="Surface Mount", Name=EMK107BB7225MA-T, Number of Pins=2, Packaging="Tape and Reel", Radiation Hardening=No, REACH SVHC="No SVHC", RoHS Compliant=Yes, Series=C, Supplier 1=Digi-Key, Supplier Unit Price 1=$0.27, Termination=SMD/SMT, Thickness=0.034inch, Voltage Rating=16V, Voltage Rating (DC)=16V, Width=0.8mm
C11 C12 C13 C14 C15 C18: library part CMP-1034-02068-3, "CAP CER 0.1UF 16V 10% X7R 0402", Capacitance="0.10 μF", Manufacturer 1="TDK Corporation", Manufacturer Part Number 1=CGA2B1X7R1C104K050BC, Package=C0402-BB, Supplier Part Number 1=445-5613-1-ND, Temperature="-55°C to +125°C", Temperature Characteristic=X7R, Temperature Coefficient=15%, Temperature Range High=+125°C, Temperature Range Low=-55°C, Tolerance=0.1, Voltage Rating="16 V", Automotive=No, Category=Cap, ComponentLink2Description=Datasheet, ComponentLink2URL=https://content.kemet.com/datasheets/KEM_C1002_X7R_SMD.pdf, Device Class L1="Passive Components", Device Class L2=Capacitors, Device Class L3="Ceramic Capacitors", Digikey Description="CAP CER 0.1UF 16V 5% X7R 0402", Height=0.55mm, Ipc Land Pattern Name=CAPC10050X50, Lead Free=Yes, Material=Ceramic, Mouser Description="CAP CER 0.1UF 16V X7R 0402", Name=CGA2B1X7R1C104K050BC, Octopart=https://octopart.com/c0402c104j4ractu-kemet-12573893, RoHS=TRUE, Supplier 1=Digi-Key, Supplier Unit Price 1=$0.1
C16 C17: library part CMP-2008-04844-1, Manufacturer 1="Murata Electronics", Manufacturer Part Number 1=GCM1555G1H220JA16D, Supplier Part Number 1=490-GCM1555G1H220JA16DCT-ND, Name=GCM1555G1H220JA16D, Supplier 1=Digi-Key, Supplier Unit Price 1=$0.1
C19: library part CMP-1034-02068-3, "CAP CER 0.1UF 16V 5% X7R 0402", Capacitance="0.10 μF", Manufacturer 1="TDK Corporation", Manufacturer Part Number 1=CGA2B1X7R1C104K050BC, Package=C0402-BB, Supplier Part Number 1=445-5613-1-ND, Temperature="-55°C to +125°C", Temperature Characteristic=X7R, Temperature Coefficient=15%, Temperature Range High=+125°C, Temperature Range Low=-55°C, Tolerance=0.05, Voltage Rating="16 V", Automotive=No, Category=Cap, ComponentLink2Description=Datasheet, ComponentLink2URL=https://content.kemet.com/datasheets/KEM_C1002_X7R_SMD.pdf, Device Class L1="Passive Components", Device Class L2=Capacitors, Device Class L3="Ceramic Capacitors", Digikey Description="CAP CER 0.1UF 16V 5% X7R 0402", Height=0.55mm, Ipc Land Pattern Name=CAPC10050X50, Lead Free=Yes, Material=Ceramic, Mouser Description="CAP CER 0.1UF 16V X7R 0402", Name=CGA2B1X7R1C104K050BC, Octopart=https://octopart.com/c0402c104j4ractu-kemet-12573893, RoHS=TRUE, Supplier 1=Digi-Key, Supplier Unit Price 1=$0.1
C20: library part CMP-1034-02068-3, "CAP CER 0.1UF 16V 5% X7R 0402", Capacitance="0.10 μF", Manufacturer 1="TDK Corporation", Manufacturer Part Number=C0402C104J4RACTU, Manufacturer Part Number 1=CGA2B1X7R1C104K050BC, Package=C0402-BB, Supplier Part Number 1=445-5613-1-ND, Temperature="-55°C to +125°C", Temperature Characteristic=X7R, Temperature Coefficient=15%, Temperature Range High=+125°C, Temperature Range Low=-55°C, Tolerance=0.05, Voltage Rating="16 V", Automotive=No, Category=Cap, ComponentLink2Description=Datasheet, ComponentLink2URL=https://content.kemet.com/datasheets/KEM_C1002_X7R_SMD.pdf, Device Class L1="Passive Components", Device Class L2=Capacitors, Device Class L3="Ceramic Capacitors", Digikey Description="CAP CER 0.1UF 16V 5% X7R 0402", Height=0.55mm, Ipc Land Pattern Name=CAPC10050X50, Lead Free=Yes, Material=Ceramic, Mouser Description="CAP CER 0.1UF 16V X7R 0402", Name=CGA2B1X7R1C104K050BC, Octopart=https://octopart.com/c0402c104j4ractu-kemet-12573893, RoHS=TRUE, Supplier 1=Digi-Key, Supplier Unit Price 1=$0.1
C21: library part CMP-1034-02068-3, "CAP CER 0402 10NF 50V X7R 5%", Capacitance="0.01 μF", Manufacturer 1=KEMET, Manufacturer Part Number=C0402C104J4RACTU, Manufacturer Part Number 1=C0402C103J5RECAUTO, Package=C0402-BB, Supplier Part Number 1=399-C0402C103J5RECAUTOCT-ND, Temperature="-55°C to +125°C", Temperature Characteristic=X7R, Temperature Coefficient=15%, Temperature Range High=+125°C, Temperature Range Low=-55°C, Tolerance=0.05, Voltage Rating="50 V", Automotive=No, Category=Cap, ComponentLink2Description=Datasheet, ComponentLink2URL=https://content.kemet.com/datasheets/KEM_C1002_X7R_SMD.pdf, Device Class L1="Passive Components", Device Class L2=Capacitors, Device Class L3="Ceramic Capacitors", Digikey Description="CAP CER 0402 10NF 50V X7R 5%", Height=0.55mm, Ipc Land Pattern Name=CAPC10050X50, Lead Free=Yes, Material=Ceramic, Mouser Description="CAP CER 0402 10NF 50V X7R 5%", Name=C0402C103J5RECAUTO, Octopart=https://octopart.com/c0402c104j4ractu-kemet-12573893, RoHS=TRUE, Supplier 1=Digi-Key, Supplier Unit Price 1=$0.18
C22: library part CMP-1034-02068-3, "CAP CER 0.1UF 16V 5% X7R 0402", Capacitance="2.2 nF", Manufacturer 1=KEMET, Manufacturer Part Number 1=C0402C222K3RECAUTO, Package=C0402-BB, Supplier Part Number 1=399-C0402C222K3RECAUTOCT-ND, Temperature="-55°C to +125°C", Temperature Characteristic=X7R, Temperature Coefficient=15%, Temperature Range High=+125°C, Temperature Range Low=-55°C, Tolerance=0.05, Voltage Rating="25 V", Automotive=No, Category=Cap, ComponentLink2Description=Datasheet, ComponentLink2URL=https://content.kemet.com/datasheets/KEM_C1002_X7R_SMD.pdf, Device Class L1="Passive Components", Device Class L2=Capacitors, Device Class L3="Ceramic Capacitors", Digikey Description="CAP CER 0402 2.2NF 25V X7R 10%", Height=0.55mm, Ipc Land Pattern Name=CAPC10050X50, Lead Free=Yes, Material=Ceramic, Mouser Description="CAP CER 0402 2.2NF 25V X7R 10%", Name=C0402C222K3RECAUTO, Octopart=https://octopart.com/c0402c104j4ractu-kemet-12573893, RoHS=TRUE, Supplier 1=Digi-Key, Supplier Unit Price 1=$0.15
D1 D3: library part CMP-07200-000004-1, "TVS DIODE 5.3V 2XDFN", Breakdown Voltage=7V, Capacitance=0.24pF, Clamping Voltage=13V, Manufacturer 1=onsemi, Manufacturer Part Number 1=SZESD7471N2T5G, Max Junction Temp=+150°C, Package=711AM-CA, Reverse Standoff Voltage=5.3V, Supplier Part Number 1=SZESD7471N2T5GOSCT-ND, Temperature="-55°C to +150°C", Temperature Range Low=-55°C, Automotive=Yes, Automotive Grade="Grade 0", Category=Diode, ComponentLink2Description=Datasheet, ComponentLink2URL=https://datasheet.octopart.com/SZESD7471N2T5G-ON-Semiconductor-datasheet-32011129.pdf, Device Class L1="Circuit Protection", Device Class L2="TVS Diodes", Device Class L3=unset, Digikey Description="TVS DIODE 5.3V 2XDFN", Direction=Bidirectional, Footprint Url=https://www.onsemi.com/pub/Collateral/711AM.PDF, Height=0.44mm, Lead Free=Yes, Mouser Description="Ultra-Low Capacitance ESD Protection low cap ESD protection in SOD-882", Name=SZESD7471N2T5G, Number Of Channels=1, Octopart=https://octopart.com/szesd7471n2t5g-on+semiconductor-47358903, RoHS=TRUE, Supplier 1=Digi-Key, Supplier Unit Price 1=$0.43, Temperature Range High=+150°C
D2: library part CMP-22017-000008-1, "LED WHITE", Case Code (Imperial)=0603, Case Code (Metric)=1608, Color=Blue, Forward Current=20mA, Forward Voltage=3.8V, Lens Color=Colorless, Max Operating Temperature=80°C, Max Power Dissipation=75mW, Min Operating Temperature=-20°C, Package Quantity=1, Power Dissipation=76mW, Reverse Voltage=5V, Case/Package=0603, Depth=1.6mm, Dominant Wavelength=475nm, Height=0.55mm, Illumination Color=Blue, Lead Free="Lead Free", Length=0.8mm, Lens Style=Diffused, Lens Transparency=Clear, Luminous Intensity=180mcd, Mount="Surface Mount", Number of Elements=1, Number of LEDs=1, Number of Pins=2, Packaging="Tape and Reel", Radiation Hardening=No, Test Current=20mA, Viewing Angle=130°, Wavelength=468nm, Width=0.8mm
D4: library part CMP-2000-07254-1, "Low Current LED, 40 mW, 1.8 V, -40 to 100 degC, 2-Pin SMD (0603), RoHS, Tape and Reel", Forward Current If=2mA, Forward Voltage=1.8V, LED Colour=Red, Manufacturer=Vishay, Package Description="2-Pin Surface Mount Device, Body 1.6 x 0.8 mm", Package Reference=TLMS1000, Automotive Qualification Standard=AEC-Q100, Bulb Size=1.6mmx0.8mm, Datasheet URL=https://datasheet.ciiva.com/5798/1698881-5798337.pdf, Datasheet Version="Rev. 1.7, 02/2011", LED Mounting=SMD, Lens Shape=Rectangular, Luminous Intensity=4mcd, Manufacturer URL=http://www.vishay.com/, Mounting Technology=SurfaceMount, MSL=MSL2-1year, Packaging=CutTape, Product Range=-, SVHC=ToBeAdvised, Viewing Angle=80°, Wavelength Typ=636nm
FB1: library part CMP-08257-000110-1, "Signal Line Ferrite Bead 120Ω @ 100MHz 500mA DCR 220mΩ SMD 0402", Case Code (Imperial)=0402, Case Code (Metric)=1005, Current Rating=500mA, DC Resistance (DCR)=250mR, Manufacturer 1="Laird-Signal Integrity Products", Manufacturer Part Number 1=LI0402D121R-10, Package Quantity=1, Supplier Part Number 1=240-2361-1-ND, Tolerance=25%, Case/Package=0402, Core Material=Ferrite, Depth=0.5mm, Height=0.022inch, Impedance=120R, Lead Free="Lead Free", Length=0.039inch, Max DC Current=500mA, Mount="Surface Mount", Name=LI0402D121R-10, Packaging="Tape and Reel", REACH SVHC="No SVHC", RoHS Compliant=Yes, Series=MMZ, Supplier 1=Digi-Key, Supplier Unit Price 1=$0.18, Width=0.02inch
J1: library part CMP-04776-000342-1, "CONN HEADER R/A 2POS 2MM", Contact Resistance=20mR, Current Rating=2A, Housing Color=Black, Manufacturer 1="Sullins Connector Solutions", Manufacturer Part Number 1=SWR201-NRTN-S02-RL-WH, Max Current Rating=3A, Max Operating Temperature=105°C, Max Voltage Rating (AC)=125V, Max Voltage Rating (DC)=250V, Min Operating Temperature=-40°C, Package Quantity=2000, Supplier Part Number 1=S9443-ND, Contact Gender=Male, Contact Material=Brass, Contact Plating=Tin, Depth=13.59mm, Gender=Male, Glow Wire Compliant=Non-compliant, Height=6.99mm, Housing Material=Nylon, Length=11.07mm, Mount="Through Hole", Name=SWR201-NRTN-S02-RL-WH, Number of Circuits=2, Number of Contacts=2, Number of Positions=2, Number of Rows=1, Orientation="Right Angle", Packaging=Tray, Pitch=2mm, Radiation Hardening=No, RoHS Compliant=Yes, Series=53254, Supplier 1=Digi-Key, Supplier Unit Price 1=$0.13, Termination="Through Hole", Voltage Rating=125V
J2: library part CMP-03357-000009-1, "CONN SMA JACK R/A 50 OHM PCB", Manufacturer 1="TE Connectivity AMP Connectors", Supplier Part Number 1=17-5-1814400-2CT-ND, Manufacturer Part Number 1=5-1814400-2, Name=5-1814400-2, Supplier 1=Digi-Key, Supplier Unit Price 1=$4.54
J3: library part CMP-2000-05246-2, "CONN RCPT USB2.0 MICRO B SMD R/A", Current Rating=1.8A, Manufacturer 1=Molex, Manufacturer Part Number 1=0473460001, Package=0, Supplier Part Number 1=WM17141CT-ND, Temperature="-30°C to +85°C", Temperature Range High=+85°C, Temperature Range Low=-30°C, Voltage Rating=30V, Automotive=No, Category=Conn, ComponentLink2Description=Datasheet, ComponentLink2URL=https://www.molex.com/webdocs/datasheets/pdf/en-us/0473460001_IO_CONNECTORS.pdf, Conn Orientation="Right Angle", Contact Material=Gold,Nickel, Device Class L1=Connectors, Device Class L2="USB Connectors", Device Class L3=unset, Digikey Description="CONN RCPT USB2.0 MICRO B SMD R/A", Footprint Url=https://www.molex.com/pdm_docs/sd/473460001_sd.pdf, Height=2.945mm, Is Female=yes, Lead Free=Yes, Name=0473460001, Number of Contacts=5, Octopart=https://octopart.com/47346-0001-molex-7164928, Pitch=0.65mm, RoHS=TRUE, Shielding=true, Supplier 1=Digi-Key, Supplier Unit Price 1=$1.51, Usb Standard="USB 2.0"
J4: library part CMP-04776-000290-1, "CONN HEADER VERT 4POS 2.54MM", Current Rating=4A, Housing Color=Beige, Manufacturer 1="Sullins Connector Solutions", Manufacturer Part Number 1=PEC02DAAN, Max Operating Temperature=75°C, Min Operating Temperature=0°C, Package Quantity=12000, Supplier Part Number 1=S2012E-02-ND, Voltage Rating=250V, Contact Material=Brass, Contact Plating=Tin, Depth=5.84mm, Gender=Male, Glow Wire Compliant=Non-compliant, Halogen Free="Low Halogen", Housing Material=Nylon, Length=10.2mm, Mount="Through Hole", Name=PEC02DAAN, Number of Circuits=4, Number of Contacts=4, Number of Positions=4, Number of Rows=1, Orientation=Vertical, Packaging=Bulk, Pitch=2.54mm, Radiation Hardening=No, Series=47053, Supplier 1=Digi-Key, Supplier Unit Price 1=$0.25, Termination="Through Hole", Voltage Rating (DC)=250V
J5: library part CMP-2000-06636-2, "CONN HEADER VERT 6POS 2.54MM", Current Rating=3A, Manufacturer=Harwin, Manufacturer 1="Harwin Inc.", Manufacturer Part Number=M20-9980346, Supplier Part Number 1=952-2121-ND, Temperature="-40°C to +105°C", Temperature Range High=+105°C, Temperature Range Low=-40°C, Automotive=No, Category=Conn, ComponentLink2Description=Datasheet, ComponentLink2URL=https://cdn.harwin.com/pdfs/M20-998.pdf, Conn Gender=Male, Conn Orientation=Vertical, Contact Material=Tin,Nickel, Device Class L1=Connectors, Device Class L2="Headers and Wire Housings", Device Class L3=unset, Digikey Description="CONN HEADER VERT 6POS 2.54MM", Height=8.99mm, Lead Free=Yes, Manufacturer Part Number 1=M20-9980346, Mouser Description="2.54mm (0.1\") Pitch DIL Vertical PC Tail Pin Header, 6.1mm mating pin height, tin, 3+3 contacts", Name=M20-9980346, Number of Contacts=6, Number of Rows=2, Octopart=https://octopart.com/m20-9980346-harwin-5436545, Package=M20-9980346, Pitch=2.54mm, RoHS=TRUE, Supplier 1=Digi-Key, Supplier Unit Price 1=$0.3
L1: library part CMP-06042-016317-1, "2.2 µH Unshielded Multilayer Inductor 900 mA 170mOhm Max 0806 (2016 Metric)", Case Code (Imperial)=0805, Case Code (Metric)=2012, Current Rating=800mA, DC Resistance (DCR)=288mR, Inductance=2.2uH, Inductance Tolerance=30%, Manufacturer 1="Walsin Technology Corporation", Manufacturer Part Number 1=WLFM201209M2R2PC, Max Operating Temperature=125°C, Min Operating Temperature=-55°C, Package Quantity=4000, Self Resonant Frequency=40MHz, Supplier Part Number 1=1292-WLFM201209M2R2PCCT-ND, Test Frequency=1MHz, Case/Package=0805, Core Material=Ferrite, DC Current=800mA, Depth=1.4mm, Height=0.9mm, Height - Seated (Max)=0.039inch, Lead Free="Lead Free", Length=2mm, Max DC Current=800mA, Military Standard=Not, Mount="Surface Mount", Name=WLFM201209M2R2PC, Packaging="Tape and Reel", Radiation Hardening=No, REACH SVHC="No SVHC", RoHS Compliant=Yes, Series=LQM, Shielding=Shielded, Supplier 1=Digi-Key, Supplier Unit Price 1=0.1, Termination=SMD/SMT, Tolerance=30%, Width=0.049inch
MD1: library part CMP-204316-000001-1, "RX TXRX MODULE ISM < 1GHZ SMD", Case/Package=SMD/SMT, Current - Receiving=12.1mA, Current - Transmitting=120mA, Frequency=868MHz, Manufacturer 1=HOPEMICROELECTRONICS, Manufacturer Part Number 1=RFM95W-868S2R, Max Operating Temperature=70°C, Min Operating Temperature=-20°C, Data Rate=300Kbps, Interface=SPI, Mount="Surface Mount", Name=RFM95W-868S2R, Packaging=Bulk, Sensitivity=-123dBm, Supplier 1=Digi-Key, Supplier Part Number 1=RFM95W-868S2R, Supplier Unit Price 1=$8.24
P1 P2: library part CMP-1502-01086-1, "THT Vertical Pin Header WR-PHD, Pitch 2.54 mm, Single Row, 12 pins", Contact Resistance=20mOhm, Manufacturer 1="Würth Elektronik", Manufacturer Part Number 1=61301211121, Operating Temperature=-40to105degC, Rated Current=3A, Supplier Part Number 1=732-5323-ND, Withstanding Voltage=500VAC, Working Voltage=250VAC, Datasheet URL=https://katalog.we-online.de/em/datasheet/6130xx11121.pdf, Gender=Male, Manufacturer URL=http://www.we-online.de, Mounting Technology=THT, Name=61301211121, Orientation=Vertical, Package Reference=61301211121, Packaging=Bag, Pin Number=12, Pitch=2.54mm, Publisher=WurthElektronik, Row Number=Single, Supplier 1=Digi-Key, Supplier Unit Price 1=$0.57
R1: library part CMP-2000-03465-1, Manufacturer 1="Vishay Dale", Manufacturer Part Number 1=CRCW0603562KFKEA, Supplier Part Number 1=541-562KHCT-ND, Name=CRCW0603562KFKEA, Supplier 1=Digi-Key, Supplier Unit Price 1=$0.1
R2: library part CMP-2000-00875-1, "100 kOhms ±0.1% 0.1W, 1/10W Chip Resistor 0603 (1608 Metric) Automotive AEC-Q200 Thin Film", Manufacturer 1="Panasonic Electronic Components", Manufacturer Part Number 1=ERA-3AEB104V, Supplier Part Number 1=P100KDBCT-ND, Name=ERA-3AEB104V, Supplier 1=Digi-Key, Supplier Unit Price 1=$0.35
R3: library part CMP-1011-00962-2, Manufacturer 1="Vishay Dale", Manufacturer Part Number 1=CRCW040210M0FKED, Supplier Part Number 1=541-10.0MLCT-ND, Name=CRCW040210M0FKED, Supplier 1=Digi-Key, Supplier Unit Price 1=$0.1
R4: library part CMP-2000-07588-1, "Chip Resistor, 10 KOhm, +/- 1%, 0.1 W, -55 to 155 degC, 0402 (1005 Metric), RoHS, Tape and Reel", Case Code (Imperial)=0402, Case Code (Metric)=1005, Manufacturer 1="Vishay Beyschlag/Draloric/BC Components", Manufacturer Part Number 1=MCS04020C1002FE000, Max Operating Temperature=155degC, Max Power Dissipation=100mW, Min Operating Temperature=-55degC, Package Description="2-Pin Surface Mount Device, Body 1 x 0.5 mm", Package Quantity=1, Package Reference=402, Resistance=10KOhm, Supplier Part Number 1=MCS0402-10.0K-CFCT-ND, Temperature Coefficient=100ppm\/degreesC, Tolerance=1%, Voltage Rating=50V, Case\/Package=0402, Composition=ThickFilm, Contact Plating=Tin, Datasheet URL=https://industrial.panasonic.com/cdbs/www-data/pdf/RDA0000/AOA0000C304.pdf, Datasheet Version=02/2017, Depth=0.5mm, Height=0.35mm, Lead Free=LeadFree, Length=1mm, Military Standard=Not, Mount=SurfaceMount, Mounting Technology=SurfaceMount, Name=MCS04020C1002FE000, Number of Pins=2, Number of Terminations=2, Packaging=TapeandReel, Power Rating=100mW, Radiation Hardening=No, REACH SVHC=NoSVHC, RoHSCompliant=True, Supplier 1=Digi-Key, Supplier Unit Price 1=$0.15, Termination=SMD/SMT, Voltage Rating (DC)=50V, Width=0.02inch
R5 R6: library part CMP-2002-00608-4, "RES SMD 100K OHM 1% 1/10W 0402", Case Code (Imperial)=0402, Case Code (Metric)=1005, Manufacturer 1="Panasonic Electronic Components", Manufacturer Part Number 1=ERJ-PA2J104X, Max Operating Temperature=155°C, Max Power Dissipation=100mW, Min Operating Temperature=-55°C, Package Quantity=1, Resistance=100kR, Supplier Part Number 1=P17205CT-ND, Temperature Coefficient=100ppm/°C, Tolerance=1%, Voltage Rating=50V, Case/Package=0402, Composition="Thick Film", Contact Plating=Tin, Depth=0.5mm, Features="Automotive AEC-Q200", Height=0.35mm, Lead Free="Lead Free", Length=1mm, Military Standard=Not, Mount="Surface Mount", Name=ERJ-PA2J104X, Number of Pins=2, Number of Terminations=2, Packaging="Tape and Reel", Power Rating=100mW, Radiation Hardening=No, REACH SVHC="No SVHC", Supplier 1=Digi-Key, Supplier Unit Price 1=$0.16, Termination=SMD/SMT, Voltage Rating (DC)=50V, Width=0.5mm
R7: library part CMP-1011-00510-4, "Chip Resistor, 1 KOhm, +/- 1%, 100 mW, -55 to 155 degC, 0402 (1005 Metric), RoHS, Tape and Reel", Case Code (Imperial)=0402, Case Code (Metric)=1005, Manufacturer="Basic Passives", Manufacturer 1="Panasonic Electronic Components", Manufacturer Part Number 1=ERJ-2RKF1001X, Max Operating Temperature="155 degC", Min Operating Temperature="-55 degC", Package Quantity=10000, Power Rating="100 mW", Resistance="1 KOhm", Supplier Part Number 1=P1.00KLCT-ND, Tolerance=1%, Voltage Rating="50 V", Case\/Package=0402, ComponentLink1Description="Manufacturer URL", ComponentLink1URL=http://www.panasonic.com/, ComponentLink2Description=Datasheet, ComponentLink2URL=http://industrial.panasonic.com/cdbs/www-data/pdf/RDA0000/AOA0000C86.pdf, DatasheetVersion=04/2015, Height="0.35 mm", Length="1 mm", Mount="Surface Mount", Mounting Technology="Surface Mount", Name=ERJ-2RKF1001X, PackageDescription="2-Pin Surface Mount Device, Body 1 x 0.5 mm", PackageReference=0402, Packaging="Tape and Reel", Pins=2, Radiation Hardening=No, REACH SVHC=Yes, RoHSCompliant=true, Supplier 1=Digi-Key, Supplier Unit Price 1=$0.10, Width="0.5 mm"
R8 R9: library part CMP-2002-07567-1, Manufacturer 1=YAGEO, Manufacturer Part Number 1=RC0402FR-072K2L, Supplier Part Number 1=311-2.20KLRCT-ND, Name=RC0402FR-072K2L, Supplier 1=Digi-Key, Supplier Unit Price 1=$0.1
R10: library part CMP-2002-07464-1, Manufacturer="Yageo / Phycomp", Manufacturer 1=YAGEO, Manufacturer Part Number 1=RC0402FR-071K5L, Supplier Part Number 1=311-1.50KLRCT-ND, Name=RC0402FR-071K5L, Part Number=RC0402FR-071K5L, Supplier 1=Digi-Key, Supplier Unit Price 1=$0.1
R11: library part CMP-1011-00510-4, "Chip Resistor, 1 KOhm, +/- 1%, 100 mW, -55 to 155 degC, 0402 (1005 Metric), RoHS, Tape and Reel", Case Code (Imperial)=0402, Case Code (Metric)=1005, Manufacturer 1="Panasonic Electronic Components", Manufacturer Part Number 1=ERJ-2RKF1001X, Max Operating Temperature="155 degC", Min Operating Temperature="-55 degC", Package Quantity=10000, Power Rating="100 mW", Resistance="1 KOhm", Supplier Part Number 1=P1.00KLCT-ND, Tolerance=1%, Voltage Rating="50 V", Case\/Package=0402, ComponentLink1Description="Manufacturer URL", ComponentLink1URL=http://www.panasonic.com/, ComponentLink2Description=Datasheet, ComponentLink2URL=http://industrial.panasonic.com/cdbs/www-data/pdf/RDA0000/AOA0000C86.pdf, DatasheetVersion=04/2015, Height="0.35 mm", Length="1 mm", Mount="Surface Mount", Mounting Technology="Surface Mount", Name=ERJ-2RKF1001X, PackageDescription="2-Pin Surface Mount Device, Body 1 x 0.5 mm", PackageReference=0402, Packaging="Tape and Reel", Pins=2, Radiation Hardening=No, REACH SVHC=Yes, RoHSCompliant=true, Supplier 1=Digi-Key, Supplier Unit Price 1=$0.1, Width="0.5 mm"
SW1: library part CMP-2000-07511-1, "FSMSM Push Button Switch, 50 mA, -35 to 85 degC, 2-Pin SMD, RoHS, Bulk", Case\/Package=SMD/SMT, Contact Current Rating=50mA, Contact Resistance=100mOhm, Manufacturer="TE Connectivity", Manufacturer 1="TE Connectivity ALCOSWITCH Switches", Manufacturer Part Number 1=FSMSM, Max Operating Temperature=85degC, Max Voltage Rating (DC)=12V, Min Operating Temperature=-35degC, Operating Force=180gf, Package Description="2-Pin Surface Mount Device, Body 6 x 3.5 mm, Pitch 9.19 mm", Package Quantity=1000, Supplier Part Number 1=450-1140-ND, Voltage Rating (DC)=24V, Actuator Length=1.07mm, Actuator Material=Polyamide, Contact Material=Brass, Contact Plating=Silver, Current Rating=50mA, Datasheet URL=http://www.te.com/commerce/DocumentDelivery/DDEController?Action=showdoc&DocId=Customer+Drawing%7F1437566-3%7FC2%7Fpdf%7FEnglish%7FENG_CD_1437566-3_C2_1437566_3_1_c.dwg.pdf%7F1437566-3, Datasheet Version="Rev. C2, 08/2014", Electrical Life=20000Cycles, ELV=Compliant, Illumination Type=Illuminated, Lead Free=LeadFree, Manufacturer URL=http://www.te.com/, Mechanical Life=20000Cycles, Mount=SurfaceMount, Mounting Technology=SurfaceMount, Name=FSMSM, Orientation=Straight, Package Reference=FSMSM, Packaging=LoosePiece, REACH SVHC=Unknown, RoHSCompliant=true, Supplier 1=Digi-Key, Supplier Unit Price 1=$0.32, Switch Travel=0.25mm, Termination=GullWing, Throw Configuration=SPST
U1: library part CMP-0063-01053-3, "2MHz, 600mA Step-Down DC-DC Converter, 5-pin SOT-23, Pb-Free", Manufacturer="Texas Instruments", Manufacturer Part Number 1=LM3674MF-ADJ/NOPB, PackageTopMarking=SLTB*XTT, PowerWise=Y, Supplier Part Number 1=LM3674MF-ADJ/NOPBCT-ND, ComponentLink1Description="Datasheet URL", ComponentLink1URL=http://www.ti.com/general/docs/lit/getliterature.tsp?genericPartNumber=LM3674&fileType=pdf, CompType=MiscPower, Name=LM3674MF-ADJ/NOPB, PackageDescription="Molded SOT-23, .115 x .063 x .040 in Body, 5 Lead, .0375 in Pitch", PackageReference=DBV0005A, PinCount=5, RoHS=Y, Supplier 1=Digi-Key, Supplier Unit Price 1=$1.74